# Allegro board ultrasound_dlp_p0_20171128.brd
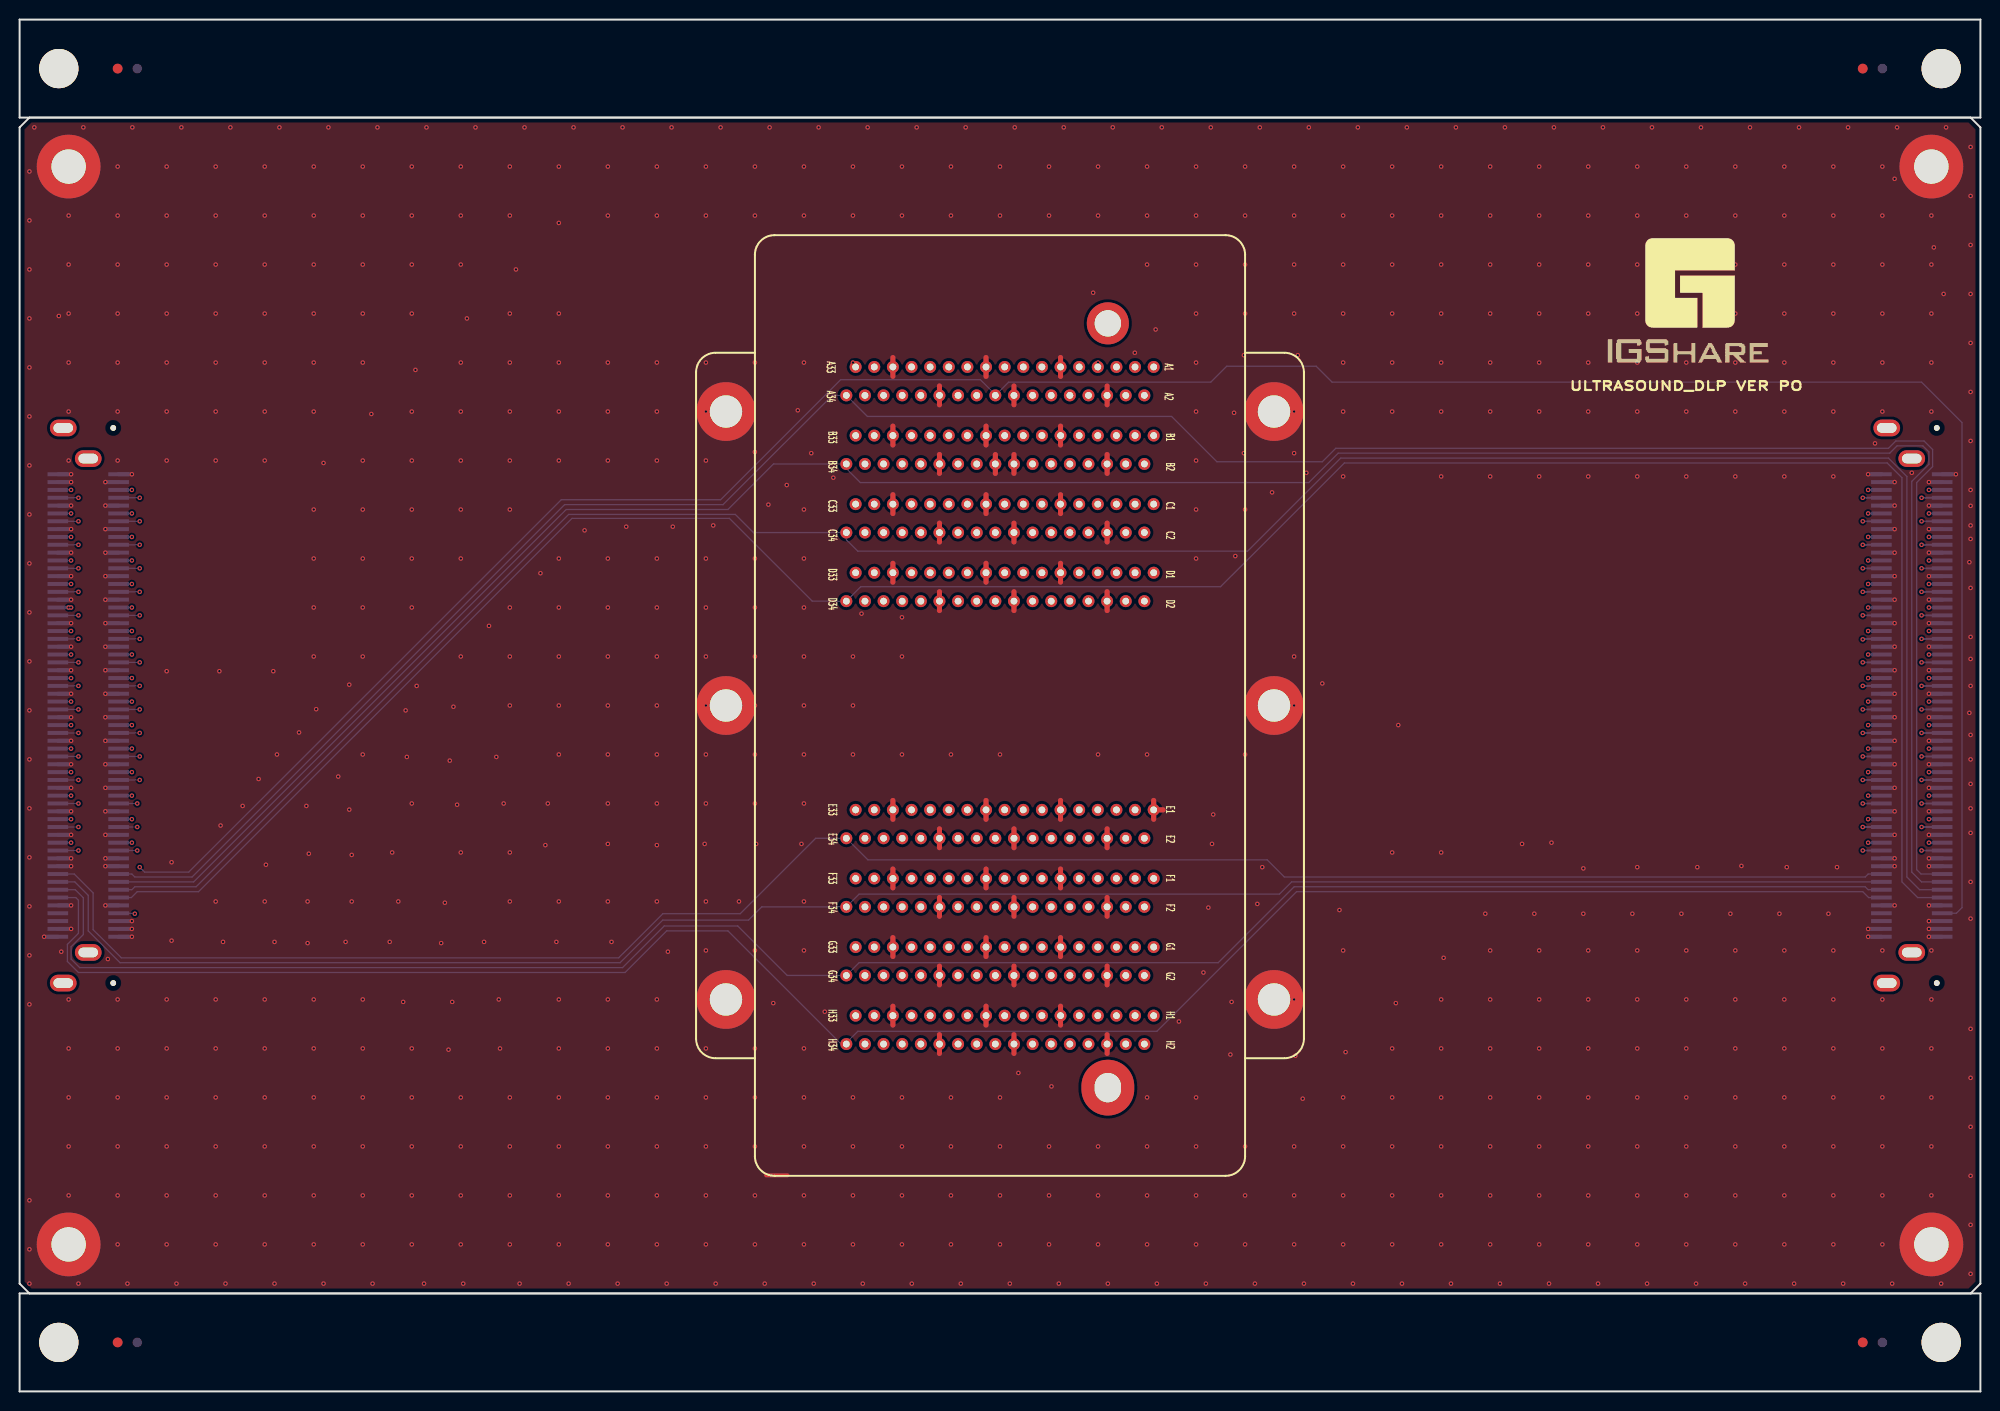
[diagram p0: board, top side]
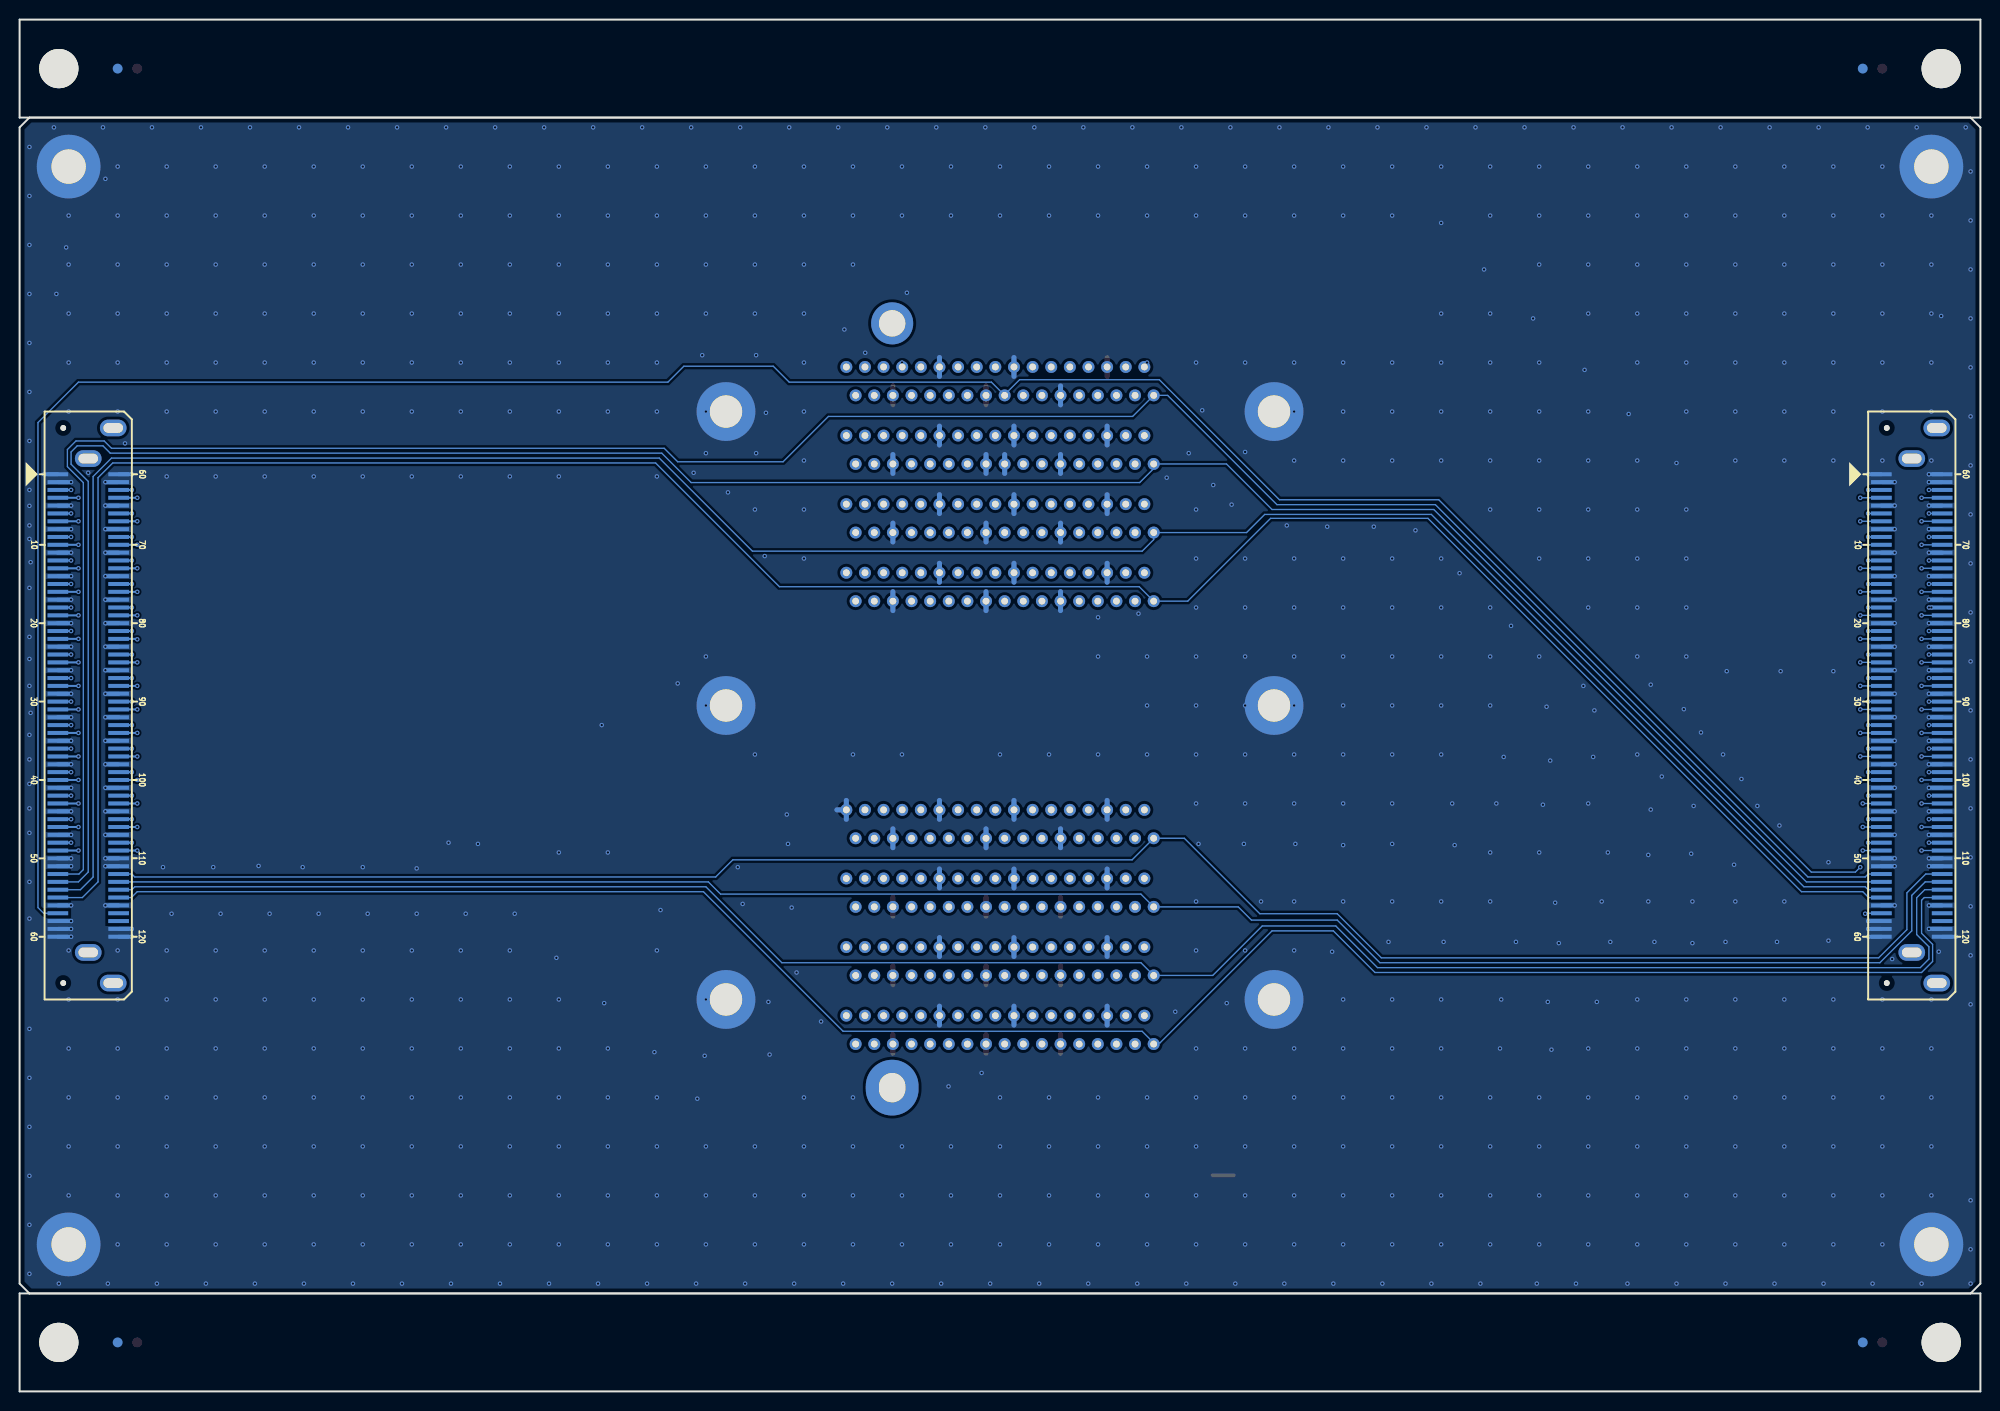
[diagram p1: board, bottom side, seen from below]

Outline 200 x 140 mm; copper layers: TOP, SIG1, GND1, SIG2, GND2, SIG3, GND3, SIG4, GND4, BOTTOM. Coordinates in mm from the lower left corner of the outline.
Outline path: 199,10 1,10 0,11 0,129 1,130 199,130 200,129 200,11 199,10 ; 199,10 0,10 0,0 200,0 200,10 199,10 ; 0,140 0,130 200,130 200,140 0,140

## Placement (name value [footprint] x y rotation side)
H1  -  [PCB_HOLE]  5 125 0 top
H2  -  [PCB_HOLE]  195 125 0 top
H3  -  [PCB_HOLE]  5 15 0 top
H4  -  [PCB_HOLE]  195 15 0 top
J1  FX18-120P-0.8SV  [FX18-120P_0_8SV-HRS]  7 70 270 bottom
J2  FX18-120P-0.8SV  [FX18-120P_0_8SV-HRS]  193 70 270 bottom
J3  ITT__127050-0391  [ITT-127050-0391]  100 70 270 top
NOREF  -  [unnamed]  10 5 0 top
NOREF#2  -  [#2]  0 0 0 top
NOREF#3  -  [unnamed#2]  4 135 0 top
NOREF#4  -  [unnamed#2]  196 5 180 top
NOREF#5  -  [#2]  0 0 90 top
NOREF#6  -  [unnamed]  10 135 0 top
NOREF#7  -  [#2]  1 10 90 top
NOREF#8  -  [#2]  0 130 90 top
NOREF#9  -  [unnamed#2]  4 5 0 top
NOREF#10  -  [#2]  155.75 -17.25 0 top
NOREF#11  -  [unnamed]  188 135 180 top
NOREF#12  -  [unnamed#2]  196 135 180 top
NOREF#13  -  [#2]  162 105 0 top
NOREF#14  -  [#2]  207 35.75 0 top
NOREF#15  -  [unnamed]  188 5 180 top
NOREF#16  -  [unnamed]  12 135 180 bottom
NOREF#17  -  [unnamed]  190 135 0 bottom
NOREF#18  -  [unnamed]  12 5 180 bottom
NOREF#19  -  [unnamed]  190 5 0 bottom

## Library data of the parts
H1-H4 = _PCB_HOLE
J1 J2 = _FX18-120P_0_8SV-HRS
J3 = _ITT-127050-0391

## Footprints (pads in the part's own frame, mm; a bottom-side part is the same pattern mirrored in y, then rotated)
FX18-120P_0_8SV-HRS
  round 0.584 hole 0.61 unplated: (-28.325,-2.55) (28.325,-2.55)
  rect 0.406x2.108 smd: 1(-23.6,-3.1) 2(-22.8,-3.1) 3(-22,-3.1) 4(-21.2,-3.1) 5(-20.4,-3.1) 6(-19.6,-3.1) 7(-18.8,-3.1) 8(-18,-3.1) 9(-17.2,-3.1) 10(-16.4,-3.1) 11(-15.6,-3.1) 12(-14.8,-3.1) 13(-14,-3.1) 14(-13.2,-3.1) 15(-12.4,-3.1) 16(-11.6,-3.1) 17(-10.8,-3.1) 18(-10,-3.1) 19(-9.2,-3.1) 20(-8.4,-3.1) 21(-7.6,-3.1) 22(-6.8,-3.1) 23(-6,-3.1) 24(-5.2,-3.1) 25(-4.4,-3.1) 26(-3.6,-3.1) 27(-2.8,-3.1) 28(-2,-3.1) 29(-1.2,-3.1) 30(-0.4,-3.1) 31(0.4,-3.1) 32(1.2,-3.1) 33(2,-3.1) 34(2.8,-3.1) 35(3.6,-3.1) 36(4.4,-3.1) 37(5.2,-3.1) 38(6,-3.1) 39(6.8,-3.1) 40(7.6,-3.1) 41(8.4,-3.1) 42(9.2,-3.1) 43(10,-3.1) 44(10.8,-3.1) 45(11.6,-3.1) 46(12.4,-3.1) 47(13.2,-3.1) 48(14,-3.1) 49(14.8,-3.1) 50(15.6,-3.1) 51(16.4,-3.1) 52(17.2,-3.1) 53(18,-3.1) 54(18.8,-3.1) 55(19.6,-3.1) 56(20.4,-3.1) 57(21.2,-3.1) 58(22,-3.1) 59(22.8,-3.1) 60(23.6,-3.1) 61(-23.6,3.1) 62(-22.8,3.1) 63(-22,3.1) 64(-21.2,3.1) 65(-20.4,3.1) 66(-19.6,3.1) 67(-18.8,3.1) 68(-18,3.1) 69(-17.2,3.1) 70(-16.4,3.1) 71(-15.6,3.1) 72(-14.8,3.1) 73(-14,3.1) 74(-13.2,3.1) 75(-12.4,3.1) 76(-11.6,3.1) 77(-10.8,3.1) 78(-10,3.1) 79(-9.2,3.1) 80(-8.4,3.1) 81(-7.6,3.1) 82(-6.8,3.1) 83(-6,3.1) 84(-5.2,3.1) 85(-4.4,3.1) 86(-3.6,3.1) 87(-2.8,3.1) 88(-2,3.1) 89(-1.2,3.1) 90(-0.4,3.1) 91(0.4,3.1) 92(1.2,3.1) 93(2,3.1) 94(2.8,3.1) 95(3.6,3.1) 96(4.4,3.1) 97(5.2,3.1) 98(6,3.1) 99(6.8,3.1) 100(7.6,3.1) 101(8.4,3.1) 102(9.2,3.1) 103(10,3.1) 104(10.8,3.1) 105(11.6,3.1) 106(12.4,3.1) 107(13.2,3.1) 108(14,3.1) 109(14.8,3.1) 110(15.6,3.1) 111(16.4,3.1) 112(17.2,3.1) 113(18,3.1) 114(18.8,3.1) 115(19.6,3.1) 116(20.4,3.1) 117(21.2,3.1) 118(22,3.1) 119(22.8,3.1) 120(23.6,3.1)
  oval 1.702x2.718 hole 0.991x2.007: 121(-28.325,2.55) 122(-25.2,0) 123(25.2,0) 124(28.325,2.55)
ITT-127050-0391
  round 1.219 hole 0.7: A1(-34.55,15.675) A2(-31.65,14.725) A3(-34.55,13.775) A4(-31.65,12.825) A5(-34.55,11.875) A6(-31.65,10.925) A7(-34.55,9.975) A8(-31.65,9.025) A9(-34.55,8.075) A10(-31.65,7.125) A11(-34.55,6.175) A12(-31.65,5.225) A13(-34.55,4.275) A14(-31.65,3.325) A15(-34.55,2.375) A16(-31.65,1.425) A17(-34.55,0.475) A18(-31.65,-0.475) A19(-34.55,-1.425) A20(-31.65,-2.375) A21(-34.55,-3.325) A22(-31.65,-4.275) A23(-34.55,-5.225) A24(-31.65,-6.175) A25(-34.55,-7.125) A26(-31.65,-8.075) A27(-34.55,-9.025) A28(-31.65,-9.975) A29(-34.55,-10.925) A30(-31.65,-11.875) A31(-34.55,-12.825) A32(-31.65,-13.775) A33(-34.55,-14.725) A34(-31.65,-15.675) B1(-27.55,15.675) B2(-24.65,14.725) B3(-27.55,13.775) B4(-24.65,12.825) B5(-27.55,11.875) B6(-24.65,10.925) B7(-27.55,9.975) B8(-24.65,9.025) B9(-27.55,8.075) B10(-24.65,7.125) B11(-27.55,6.175) B12(-24.65,5.225) B13(-27.55,4.275) B14(-24.65,3.325) B15(-27.55,2.375) B16(-24.65,1.425) B17(-27.55,0.475) B18(-24.65,-0.475) B19(-27.55,-1.425) B20(-24.65,-2.375) B21(-27.55,-3.325) B22(-24.65,-4.275) B23(-27.55,-5.225) B24(-24.65,-6.175) B25(-27.55,-7.125) B26(-24.65,-8.075) B27(-27.55,-9.025) B28(-24.65,-9.975) B29(-27.55,-10.925) B30(-24.65,-11.875) B31(-27.55,-12.825) B32(-24.65,-13.775) B33(-27.55,-14.725) B34(-24.65,-15.675) C1(-20.55,15.675) C2(-17.65,14.725) C3(-20.55,13.775) C4(-17.65,12.825) C5(-20.55,11.875) C6(-17.65,10.925) C7(-20.55,9.975) C8(-17.65,9.025) C9(-20.55,8.075) C10(-17.65,7.125) C11(-20.55,6.175) C12(-17.65,5.225) C13(-20.55,4.275) C14(-17.65,3.325) C15(-20.55,2.375) C16(-17.65,1.425) C17(-20.55,0.475) C18(-17.65,-0.475) C19(-20.55,-1.425) C20(-17.65,-2.375) C21(-20.55,-3.325) C22(-17.65,-4.275) C23(-20.55,-5.225) C24(-17.65,-6.175) C25(-20.55,-7.125) C26(-17.65,-8.075) C27(-20.55,-9.025) C28(-17.65,-9.975) C29(-20.55,-10.925) C30(-17.65,-11.875) C31(-20.55,-12.825) C32(-17.65,-13.775) C33(-20.55,-14.725) C34(-17.65,-15.675) D1(-13.55,15.675) D2(-10.65,14.725) D3(-13.55,13.775) D4(-10.65,12.825) D5(-13.55,11.875) D6(-10.65,10.925) D7(-13.55,9.975) D8(-10.65,9.025) D9(-13.55,8.075) D10(-10.65,7.125) D11(-13.55,6.175) D12(-10.65,5.225) D13(-13.55,4.275) D14(-10.65,3.325) D15(-13.55,2.375) D16(-10.65,1.425) D17(-13.55,0.475) D18(-10.65,-0.475) D19(-13.55,-1.425) D20(-10.65,-2.375) D21(-13.55,-3.325) D22(-10.65,-4.275) D23(-13.55,-5.225) D24(-10.65,-6.175) D25(-13.55,-7.125) D26(-10.65,-8.075) D27(-13.55,-9.025) D28(-10.65,-9.975) D29(-13.55,-10.925) D30(-10.65,-11.875) D31(-13.55,-12.825) D32(-10.65,-13.775) D33(-13.55,-14.725) D34(-10.65,-15.675) E1(10.65,15.675) E2(13.55,14.725) E3(10.65,13.775) E4(13.55,12.825) E5(10.65,11.875) E6(13.55,10.925) E7(10.65,9.975) E8(13.55,9.025) E9(10.65,8.075) E10(13.55,7.125) E11(10.65,6.175) E12(13.55,5.225) E13(10.65,4.275) E14(13.55,3.325) E15(10.65,2.375) E16(13.55,1.425) E17(10.65,0.475) E18(13.55,-0.475) E19(10.65,-1.425) E20(13.55,-2.375) E21(10.65,-3.325) E22(13.55,-4.275) E23(10.65,-5.225) E24(13.55,-6.175) E25(10.65,-7.125) E26(13.55,-8.075) E27(10.65,-9.025) E28(13.55,-9.975) E29(10.65,-10.925) E30(13.55,-11.875) E31(10.65,-12.825) E32(13.55,-13.775) E33(10.65,-14.725) E34(13.55,-15.675) F1(17.65,15.675) F2(20.55,14.725) F3(17.65,13.775) F4(20.55,12.825) F5(17.65,11.875) F6(20.55,10.925) F7(17.65,9.975) F8(20.55,9.025) F9(17.65,8.075) F10(20.55,7.125) F11(17.65,6.175) F12(20.55,5.225) F13(17.65,4.275) F14(20.55,3.325) F15(17.65,2.375) F16(20.55,1.425) F17(17.65,0.475) F18(20.55,-0.475) F19(17.65,-1.425) F20(20.55,-2.375) F21(17.65,-3.325) F22(20.55,-4.275) F23(17.65,-5.225) F24(20.55,-6.175) F25(17.65,-7.125) F26(20.55,-8.075) F27(17.65,-9.025) F28(20.55,-9.975) F29(17.65,-10.925) F30(20.55,-11.875) F31(17.65,-12.825) F32(20.55,-13.775) F33(17.65,-14.725) F34(20.55,-15.675) G1(24.65,15.675) G2(27.55,14.725) G3(24.65,13.775) G4(27.55,12.825) G5(24.65,11.875) G6(27.55,10.925) G7(24.65,9.975) G8(27.55,9.025) G9(24.65,8.075) G10(27.55,7.125) G11(24.65,6.175) G12(27.55,5.225) G13(24.65,4.275) G14(27.55,3.325) G15(24.65,2.375) G16(27.55,1.425) G17(24.65,0.475) G18(27.55,-0.475) G19(24.65,-1.425) G20(27.55,-2.375) G21(24.65,-3.325) G22(27.55,-4.275) G23(24.65,-5.225) G24(27.55,-6.175) G25(24.65,-7.125) G26(27.55,-8.075) G27(24.65,-9.025) G28(27.55,-9.975) G29(24.65,-10.925) G30(27.55,-11.875) G31(24.65,-12.825) G32(27.55,-13.775) G33(24.65,-14.725) G34(27.55,-15.675) H1(31.65,15.675) H2(34.55,14.725) H3(31.65,13.775) H4(34.55,12.825) H5(31.65,11.875) H6(34.55,10.925) H7(31.65,9.975) H8(34.55,9.025) H9(31.65,8.075) H10(34.55,7.125) H11(31.65,6.175) H12(34.55,5.225) H13(31.65,4.275) H14(34.55,3.325) H15(31.65,2.375) H16(34.55,1.425) H17(31.65,0.475) H18(34.55,-0.475) H19(31.65,-1.425) H20(34.55,-2.375) H21(31.65,-3.325) H22(34.55,-4.275) H23(31.65,-5.225) H24(34.55,-6.175) H25(31.65,-7.125) H26(34.55,-8.075) H27(31.65,-9.025) H28(34.55,-9.975) H29(31.65,-10.925) H30(34.55,-11.875) H31(31.65,-12.825) H32(34.55,-13.775) H33(31.65,-14.725) H34(34.55,-15.675)
  round 6 hole 3.3: AD1(-30,27.95) AD2(0,27.95) AD3(30,27.95) AD4(30,-27.95) AD5(0,-27.95) AD6(-30,-27.95)
  round 4.293 hole 2.7: AD7(-39,11)
  oval 5.69x5.385 hole 2.997x2.692: AD8(39,11)
PCB_HOLE
  round 6.502 hole 3.505: 1(0,0)
unnamed
  round 1 smd: (0,0)
unnamed#2
  round 4 hole 4 unplated: (0,0)

## Nets
GND: H1.1 H2.1 H3.1 H4.1 J1.1 J1.2 J1.5 J1.8 J1.11 J1.14 J1.17 J1.20 J1.23 J1.26 J1.29 J1.32 J1.35 J1.38 J1.41 J1.44 J1.47 J1.50 J1.51 J1.56 J1.58 J1.59 J1.60 J1.61 J1.62 J1.65 J1.68 J1.71 J1.74 J1.77 J1.80 J1.83 J1.86 J1.89 J1.92 J1.95 J1.98 J1.101 J1.104 J1.107 J1.110 J1.111 J1.116 J1.119 J1.120 J2.1 J2.2 J2.5 J2.8 J2.11 J2.14 J2.17 J2.20 J2.23 J2.26 J2.29 J2.32 J2.35 J2.38 J2.41 J2.44 J2.47 J2.50 J2.51 J2.56 J2.58 J2.59 J2.60 J2.61 J2.62 J2.65 J2.68 J2.71 J2.74 J2.77 J2.80 J2.83 J2.86 J2.89 J2.92 J2.95 J2.98 J2.101 J2.104 J2.107 J2.110 J2.111 J2.116 J2.119 J2.120 J3.A6 J3.A11 J3.A16 J3.A19 J3.A24 J3.A29 J3.AD1 J3.AD2 J3.AD3 J3.AD4 J3.AD5 J3.AD6 J3.B6 J3.B11 J3.B16 J3.B18 J3.B19 J3.B24 J3.B29 J3.C6 J3.C11 J3.C16 J3.C19 J3.C24 J3.C29 J3.D6 J3.D11 J3.D16 J3.D19 J3.D24 J3.D29 J3.E1 J3.E6 J3.E11 J3.E16 J3.E19 J3.E24 J3.E29 J3.F6 J3.F11 J3.F16 J3.F19 J3.F24 J3.F29 J3.G6 J3.G11 J3.G16 J3.G19 J3.G24 J3.G29 J3.H6 J3.H11 J3.H16 J3.H19 J3.H24 J3.H29
PRB_EL_D0: J1.3 J2.3 J3.D12
PRB_EL_D1: J1.4 J2.4 J3.D13
PRB_EL_D2: J1.6 J2.6 J3.D14
PRB_EL_D3: J1.7 J2.7 J3.D15
PRB_EL_D4: J1.9 J2.9 J3.C12
PRB_EL_D5: J1.10 J2.10 J3.C13
PRB_EL_D6: J1.12 J2.12 J3.C14
PRB_EL_D7: J1.13 J2.13 J3.C15
PRB_EL_D8: J1.15 J2.15 J3.B12
PRB_EL_D9: J1.16 J2.16 J3.B13
PRB_EL_D10: J1.18 J2.18 J3.B14
PRB_EL_D11: J1.19 J2.19 J3.B15
PRB_EL_D12: J1.21 J2.21 J3.A12
PRB_EL_D13: J1.22 J2.22 J3.A13
PRB_EL_D14: J1.24 J2.24 J3.A14
PRB_EL_D15: J1.25 J2.25 J3.A15
PRB_EL_D16: J1.27 J2.27 J3.E12
PRB_EL_D17: J1.28 J2.28 J3.E13
PRB_EL_D18: J1.30 J2.30 J3.E14
PRB_EL_D19: J1.31 J2.31 J3.E15
PRB_EL_D20: J1.33 J2.33 J3.F12
PRB_EL_D21: J1.34 J2.34 J3.F13
PRB_EL_D22: J1.36 J2.36 J3.F14
PRB_EL_D23: J1.37 J2.37 J3.F15
PRB_EL_D24: J1.39 J2.39 J3.G12
PRB_EL_D25: J1.40 J2.40 J3.G13
PRB_EL_D26: J1.42 J2.42 J3.G14
PRB_EL_D27: J1.43 J2.43 J3.G15
PRB_EL_D28: J1.45 J2.45 J3.H12
PRB_EL_D29: J1.46 J2.46 J3.H13
PRB_EL_D30: J1.48 J2.48 J3.H14
PRB_EL_D31: J1.49 J2.49 J3.H15
PRB_EL_D32: J1.63 J2.63 J3.D20
PRB_EL_D33: J1.64 J2.64 J3.D21
PRB_EL_D34: J1.66 J2.66 J3.D22
PRB_EL_D35: J1.67 J2.67 J3.D23
PRB_EL_D36: J1.69 J2.69 J3.C20
PRB_EL_D37: J1.70 J2.70 J3.C21
PRB_EL_D38: J1.72 J2.72 J3.C22
PRB_EL_D39: J1.73 J2.73 J3.C23
PRB_EL_D40: J1.75 J2.75 J3.B20
PRB_EL_D41: J1.76 J2.76 J3.B21
PRB_EL_D42: J1.78 J2.78 J3.B22
PRB_EL_D43: J1.79 J2.79 J3.B23
PRB_EL_D44: J1.81 J2.81 J3.A20
PRB_EL_D45: J1.82 J2.82 J3.A21
PRB_EL_D46: J1.84 J2.84 J3.A22
PRB_EL_D47: J1.85 J2.85 J3.A23
PRB_EL_D48: J1.87 J2.87 J3.E20
PRB_EL_D49: J1.88 J2.88 J3.E21
PRB_EL_D50: J1.90 J2.90 J3.E22
PRB_EL_D51: J1.91 J2.91 J3.E23
PRB_EL_D52: J1.93 J2.93 J3.F20
PRB_EL_D53: J1.94 J2.94 J3.F21
PRB_EL_D54: J1.96 J2.96 J3.F22
PRB_EL_D55: J1.97 J2.97 J3.F23
PRB_EL_D56: J1.99 J2.99 J3.G20
PRB_EL_D57: J1.100 J2.100 J3.G21
PRB_EL_D58: J1.102 J2.102 J3.G22
PRB_EL_D59: J1.103 J2.103 J3.G23
PRB_EL_D60: J1.105 J2.105 J3.H20
PRB_EL_D61: J1.106 J2.106 J3.H21
PRB_EL_D62: J1.108 J2.108 J3.H22
PRB_EL_D63: J1.109 J2.109 J3.H23
PRBA_PID_0: J1.52 J2.52 J3.A34
PRBA_PID_1: J1.53 J2.53 J3.B34
PRBA_PID_2: J1.54 J2.54 J3.C34
PRBA_PID_3: J1.55 J2.55 J3.D34
PRBA_PID_4: J1.112 J2.112 J3.E34
PRBA_PID_5: J1.113 J2.113 J3.F34
PRBA_PID_6: J1.114 J2.114 J3.G34
PRBA_PID_7: J1.115 J2.115 J3.H34
TXCL: J1.57 J2.57 J3.A18

Pads without a net: J1 117 118 121 122 123 124; J2 117 118 121 122 123 124; J3 A1 A2 A3 A4 A5 A7 A8 A9 A10 A17 A25 A26 A27 A28 A30 A31 A32 A33 AD7 AD8 B1 B2 B3 B4 B5 B7 B8 B9 B10 B17 B25 B26 B27 B28 B30 B31 B32 B33 C1 C2 C3 C4 C5 C7 C8 C9 C10 C17 C18 C25 C26 C27 C28 C30 C31 C32 C33 D1 D2 D3 D4 D5 D7 D8 D9 D10 D17 D18 D25 D26 D27 D28 D30 D31 D32 D33 E2 E3 E4 E5 E7 E8 E9 E10 E17 E18 E25 E26 E27 E28 E30 E31 E32 E33 F1 F2 F3 F4 F5 F7 F8 F9 F10 F17 F18 F25 F26 F27 F28 F30 F31 F32 F33 G1 G2 G3 G4 G5 G7 G8 G9 G10 G17 G18 G25 G26 G27 G28 G30 G31 G32 G33 H1 H2 H3 H4 H5 H7 H8 H9 H10 H17 H18 H25 H26 H27 H28 H30 H31 H32 H33

## Via types
v1: diameter 0.457, hole 0.25, TOP to BOTTOM, 988 vias

## Routing (per net, layer and track width the routed paths; a pad name or vN(x,y) marks a point on that pad's centre or on a via; arc(x,y) is an arc through that point)
GND: length 682.8
  TOP w0.4: 78.33,22.05 76.15,22.05
  TOP w0.515: 89.08,91.51 J3.C29 89.08,89.59 ; 89.08,60.31 J3.E29 89.08,58.39 ; 110.92,93.69 J3.B6 110.92,95.61 ; J3.E1 115.68,60.31 ; J3.E1 115.68,58.39 ; J3.E1 116.64,59.35 ; 106.17,98.51 J3.B11 106.17,96.59 ; 98.58,51.39 J3.F19 98.58,53.31 ; 101.42,57.41 J3.E16 101.42,55.49 ; 106.17,46.31 J3.G11 106.17,44.39 ; 110.92,48.49 J3.F6 110.92,50.41 ; 98.58,89.59 J3.C19 98.58,91.51 ; 89.08,51.39 J3.F29 89.08,53.31 ; 93.83,81.61 J3.D24 93.83,79.69 ; 101.42,43.41 J3.G16 101.42,41.49 ; 110.92,81.61 J3.D6 110.92,79.69 ; 98.58,82.59 J3.D19 98.58,84.51 ; 110.92,102.61 J3.A6 110.92,100.69 ; 89.08,103.59 J3.A29 89.08,105.51 ; 106.17,91.51 J3.C11 106.17,89.59 ; 110.92,41.49 J3.G6 110.92,43.41 ; 89.08,98.51 J3.B29 89.08,96.59 ; 101.42,100.69 J3.A16 101.42,102.61 ; 98.58,105.51 J3.A19 98.58,103.59 ; 93.83,48.49 J3.F24 93.83,50.41 ; 101.42,50.41 J3.F16 101.42,48.49 ; 110.92,55.49 J3.E6 110.92,57.41 ; 93.83,41.49 J3.G24 93.83,43.41 ; 93.83,86.69 J3.C24 93.83,88.61 ; 106.17,53.31 J3.F11 106.17,51.39 ; 98.58,96.59 J3.B19 98.58,98.51 ; 110.92,86.69 J3.C6 110.92,88.61 ; 98.58,44.39 J3.G19 98.58,46.31 ; 93.83,55.49 J3.E24 93.83,57.41 ; 89.08,44.39 J3.G29 89.08,46.31 ; 101.42,86.69 J3.C16 101.42,88.61 ; 98.58,60.31 J3.E19 98.58,58.39 ; 101.42,79.69 J3.D16 101.42,81.61 ; 98.58,37.39 J3.H19 98.58,39.31 ; 89.08,39.31 J3.H29 89.08,37.39 ; 106.17,82.59 J3.D11 106.17,84.51 ; 93.83,36.41 J3.H24 93.83,34.49 ; 106.17,58.39 J3.E11 106.17,60.31 ; 101.42,95.61 J3.B16 101.42,93.69 ; 110.92,36.41 J3.H6 110.92,34.49 ; 93.83,102.61 J3.A24 93.83,100.69 ; 93.83,93.69 J3.B24 93.83,95.61 ; 89.08,84.51 J3.D29 89.08,82.59 ; 99.53,95.61 J3.B18 99.53,93.69 ; 106.17,39.31 J3.H11 106.17,37.39 ; 106.17,105.51 J3.A11 106.17,103.59 ; 101.42,34.49 J3.H16 101.42,36.41
  GND1 w0.53: 93.83,93.69 J3.B24 93.83,95.61 ; 101.42,48.49 J3.F16 101.42,50.41 ; 93.83,81.61 J3.D24 93.83,79.69 ; 110.92,36.41 J3.H6 110.92,34.49 ; 110.92,88.61 J3.C6 110.92,86.69 ; 93.83,100.69 J3.A24 93.83,102.61 ; 98.58,98.51 J3.B19 98.58,96.59 ; 106.17,96.59 J3.B11 106.17,98.51 ; 98.58,37.39 J3.H19 98.58,39.31 ; 93.83,50.41 J3.F24 93.83,48.49 ; 106.17,82.59 J3.D11 106.17,84.51 ; 89.08,37.39 J3.H29 89.08,39.31 ; 110.92,57.41 J3.E6 110.92,55.49 ; 98.58,51.39 J3.F19 98.58,53.31 ; 93.83,88.61 J3.C24 93.83,86.69 ; 110.92,48.49 J3.F6 110.92,50.41 ; 101.42,43.41 J3.G16 101.42,41.49 ; 98.58,91.51 J3.C19 98.58,89.59 ; 110.92,100.69 J3.A6 110.92,102.61 ; 101.42,93.69 J3.B16 101.42,95.61 ; 101.42,86.69 J3.C16 101.42,88.61 ; 101.42,100.69 J3.A16 101.42,102.61 ; 89.08,84.51 J3.D29 89.08,82.59 ; 98.58,105.51 J3.A19 98.58,103.59 ; 110.92,79.69 J3.D6 110.92,81.61 ; 89.08,44.39 J3.G29 89.08,46.31 ; 101.42,36.41 J3.H16 101.42,34.49 ; 93.83,43.41 J3.G24 93.83,41.49 ; 98.58,58.39 J3.E19 98.58,60.31 ; 110.92,95.61 J3.B6 110.92,93.69 ; 106.17,105.51 J3.A11 106.17,103.59 ; 115.68,58.39 J3.E1 ; J3.E1 115.68,60.31 ; J3.E1 116.64,59.35 ; 89.08,105.51 J3.A29 89.08,103.59 ; 106.17,37.39 J3.H11 106.17,39.31 ; 101.42,57.41 J3.E16 101.42,55.49 ; 106.17,46.31 J3.G11 106.17,44.39 ; 98.58,84.51 J3.D19 98.58,82.59 ; 110.92,41.49 J3.G6 110.92,43.41 ; 98.58,46.31 J3.G19 98.58,44.39 ; 89.08,91.51 J3.C29 89.08,89.59 ; 99.53,93.69 J3.B18 99.53,95.61 ; 89.08,53.31 J3.F29 89.08,51.39 ; 89.08,96.59 J3.B29 89.08,98.51 ; 106.17,60.31 J3.E11 106.17,58.39 ; 101.42,81.61 J3.D16 101.42,79.69 ; 106.17,53.31 J3.F11 106.17,51.39 ; 106.17,89.59 J3.C11 106.17,91.51 ; 89.08,60.31 J3.E29 89.08,58.39 ; 93.83,55.49 J3.E24 93.83,57.41 ; 93.83,36.41 J3.H24 93.83,34.49
  GND2 w0.53: 101.42,86.69 J3.C16 101.42,88.61 ; 106.17,105.51 J3.A11 106.17,103.59 ; 110.92,57.41 J3.E6 110.92,55.49 ; 106.17,96.59 J3.B11 106.17,98.51 ; 99.53,93.69 J3.B18 99.53,95.61 ; 106.17,39.31 J3.H11 106.17,37.39 ; 89.08,105.51 J3.A29 89.08,103.59 ; 89.08,37.39 J3.H29 89.08,39.31 ; 101.42,41.49 J3.G16 101.42,43.41 ; 98.58,53.31 J3.F19 98.58,51.39 ; 98.58,46.31 J3.G19 98.58,44.39 ; 106.17,46.31 J3.G11 106.17,44.39 ; 110.92,36.41 J3.H6 110.92,34.49 ; 93.83,57.41 J3.E24 93.83,55.49 ; 98.58,96.59 J3.B19 98.58,98.51 ; 89.08,89.59 J3.C29 89.08,91.51 ; 89.08,98.51 J3.B29 89.08,96.59 ; 101.42,48.49 J3.F16 101.42,50.41 ; 98.58,58.39 J3.E19 98.58,60.31 ; 93.83,79.69 J3.D24 93.83,81.61 ; 89.08,53.31 J3.F29 89.08,51.39 ; 89.08,82.59 J3.D29 89.08,84.51 ; 115.68,58.39 J3.E1 ; J3.E1 115.68,60.31 ; J3.E1 116.64,59.35 ; 93.83,41.49 J3.G24 93.83,43.41 ; 110.92,48.49 J3.F6 110.92,50.41 ; 110.92,43.41 J3.G6 110.92,41.49 ; 98.58,91.51 J3.C19 98.58,89.59 ; 93.83,100.69 J3.A24 93.83,102.61 ; 101.42,57.41 J3.E16 101.42,55.49 ; 106.17,89.59 J3.C11 106.17,91.51 ; 110.92,79.69 J3.D6 110.92,81.61 ; 110.92,93.69 J3.B6 110.92,95.61 ; 101.42,102.61 J3.A16 101.42,100.69 ; 89.08,58.39 J3.E29 89.08,60.31 ; 98.58,103.59 J3.A19 98.58,105.51 ; 93.83,95.61 J3.B24 93.83,93.69 ; 106.17,58.39 J3.E11 106.17,60.31 ; 106.17,84.51 J3.D11 106.17,82.59 ; 89.08,46.31 J3.G29 89.08,44.39 ; 110.92,88.61 J3.C6 110.92,86.69 ; 106.17,51.39 J3.F11 106.17,53.31 ; 93.83,48.49 J3.F24 93.83,50.41 ; 98.58,39.31 J3.H19 98.58,37.39 ; 93.83,88.61 J3.C24 93.83,86.69 ; 101.42,79.69 J3.D16 101.42,81.61 ; 101.42,95.61 J3.B16 101.42,93.69 ; 101.42,34.49 J3.H16 101.42,36.41 ; 93.83,36.41 J3.H24 93.83,34.49 ; 98.58,84.51 J3.D19 98.58,82.59 ; 110.92,102.61 J3.A6 110.92,100.69
  GND3 w0.515: 98.58,39.31 J3.H19 98.58,37.39 ; 89.08,46.31 J3.G29 89.08,44.39 ; 99.53,93.69 J3.B18 99.53,95.61 ; 110.92,93.69 J3.B6 110.92,95.61 ; 101.42,102.61 J3.A16 101.42,100.69 ; 93.83,100.69 J3.A24 93.83,102.61 ; 106.17,84.51 J3.D11 106.17,82.59 ; 93.83,88.61 J3.C24 93.83,86.69 ; 106.17,98.51 J3.B11 106.17,96.59 ; 101.42,48.49 J3.F16 101.42,50.41 ; 89.08,60.31 J3.E29 89.08,58.39 ; 98.58,103.59 J3.A19 98.58,105.51 ; 101.42,57.41 J3.E16 101.42,55.49 ; 106.17,60.31 J3.E11 106.17,58.39 ; 98.58,53.31 J3.F19 98.58,51.39 ; 93.83,81.61 J3.D24 93.83,79.69 ; 98.58,91.51 J3.C19 98.58,89.59 ; 110.92,36.41 J3.H6 110.92,34.49 ; 98.58,98.51 J3.B19 98.58,96.59 ; 93.83,95.61 J3.B24 93.83,93.69 ; 101.42,79.69 J3.D16 101.42,81.61 ; 106.17,103.59 J3.A11 106.17,105.51 ; 89.08,96.59 J3.B29 89.08,98.51 ; 89.08,39.31 J3.H29 89.08,37.39 ; 106.17,46.31 J3.G11 106.17,44.39 ; 89.08,89.59 J3.C29 89.08,91.51 ; 106.17,51.39 J3.F11 106.17,53.31 ; 106.17,39.31 J3.H11 106.17,37.39 ; 110.92,79.69 J3.D6 110.92,81.61 ; 101.42,41.49 J3.G16 101.42,43.41 ; 89.08,51.39 J3.F29 89.08,53.31 ; 98.58,58.39 J3.E19 98.58,60.31 ; 106.17,89.59 J3.C11 106.17,91.51 ; 110.92,102.61 J3.A6 110.92,100.69 ; 101.42,93.69 J3.B16 101.42,95.61 ; 115.68,58.39 J3.E1 ; J3.E1 115.68,60.31 ; J3.E1 116.64,59.35 ; 110.92,48.49 J3.F6 110.92,50.41 ; 93.83,36.41 J3.H24 93.83,34.49 ; 93.83,57.41 J3.E24 93.83,55.49 ; 93.83,43.41 J3.G24 93.83,41.49 ; 101.42,36.41 J3.H16 101.42,34.49 ; 110.92,43.41 J3.G6 110.92,41.49 ; 98.58,44.39 J3.G19 98.58,46.31 ; 101.42,88.61 J3.C16 101.42,86.69 ; 98.58,82.59 J3.D19 98.58,84.51 ; 110.92,55.49 J3.E6 110.92,57.41 ; 89.08,103.59 J3.A29 89.08,105.51 ; 93.83,50.41 J3.F24 93.83,48.49 ; 89.08,84.51 J3.D29 89.08,82.59 ; 110.92,86.69 J3.C6 110.92,88.61
  GND4 w0.515: 106.17,39.31 J3.H11 106.17,37.39 ; 110.92,81.61 J3.D6 110.92,79.69 ; 101.42,55.49 J3.E16 101.42,57.41 ; 110.92,102.61 J3.A6 110.92,100.69 ; 101.42,79.69 J3.D16 101.42,81.61 ; 106.17,103.59 J3.A11 106.17,105.51 ; 89.08,98.51 J3.B29 89.08,96.59 ; 93.83,102.61 J3.A24 93.83,100.69 ; 93.83,95.61 J3.B24 93.83,93.69 ; 101.42,41.49 J3.G16 101.42,43.41 ; 110.92,88.61 J3.C6 110.92,86.69 ; 93.83,55.49 J3.E24 93.83,57.41 ; 98.58,105.51 J3.A19 98.58,103.59 ; 93.83,86.69 J3.C24 93.83,88.61 ; 101.42,50.41 J3.F16 101.42,48.49 ; 93.83,79.69 J3.D24 93.83,81.61 ; 89.08,89.59 J3.C29 89.08,91.51 ; 98.58,98.51 J3.B19 98.58,96.59 ; 101.42,100.69 J3.A16 101.42,102.61 ; 98.58,84.51 J3.D19 98.58,82.59 ; 101.42,34.49 J3.H16 101.42,36.41 ; 106.17,46.31 J3.G11 106.17,44.39 ; 106.17,84.51 J3.D11 106.17,82.59 ; 93.83,36.41 J3.H24 93.83,34.49 ; 110.92,41.49 J3.G6 110.92,43.41 ; 110.92,36.41 J3.H6 110.92,34.49 ; 110.92,55.49 J3.E6 110.92,57.41 ; 93.83,50.41 J3.F24 93.83,48.49 ; 89.08,39.31 J3.H29 89.08,37.39 ; 101.42,88.61 J3.C16 101.42,86.69 ; 98.58,60.31 J3.E19 98.58,58.39 ; 106.17,96.59 J3.B11 106.17,98.51 ; 99.53,95.61 J3.B18 99.53,93.69 ; 98.58,44.39 J3.G19 98.58,46.31 ; 106.17,91.51 J3.C11 106.17,89.59 ; 89.08,51.39 J3.F29 89.08,53.31 ; 89.08,46.31 J3.G29 89.08,44.39 ; 110.92,48.49 J3.F6 110.92,50.41 ; 89.08,82.59 J3.D29 89.08,84.51 ; 93.83,43.41 J3.G24 93.83,41.49 ; 89.08,60.31 J3.E29 89.08,58.39 ; J3.E1 116.64,59.35 ; J3.E1 115.68,58.39 ; J3.E1 115.68,60.31 ; 89.08,103.59 J3.A29 89.08,105.51 ; 98.58,53.31 J3.F19 98.58,51.39 ; 98.58,91.51 J3.C19 98.58,89.59 ; 101.42,95.61 J3.B16 101.42,93.69 ; 98.58,39.31 J3.H19 98.58,37.39 ; 106.17,60.31 J3.E11 106.17,58.39 ; 106.17,51.39 J3.F11 106.17,53.31 ; 110.92,95.61 J3.B6 110.92,93.69
  BOTTOM w0.4: J2.14 v1(194.75,83.2) ; J1.1 v1(11.45,93.6) ; J2.56 v1(194.75,49.6) ; J1.35 v1(8.75,66.4) ; J2.111 v1(191.25,53.6) ; J2.5 v1(194.75,90.4) ; J1.50 v1(8.75,54.4) ; J2.29 v1(194.75,71.2) ; J2.110 v1(191.25,54.4) ; J1.11 v1(8.75,85.6) ; J1.111 v1(5.25,53.6) ; J2.20 v1(194.75,78.4) ; J1.58 v1(11.45,48) ; J2.74 v1(191.25,83.2) ; J2.61 v1(188.55,93.6) ; J1.71 v1(5.25,85.6) ; J1.5 v1(8.75,90.4) ; J2.92 v1(191.25,68.8) ; J1.2 v1(8.75,92.8) ; J1.120 v1(2.5,46.4) ; J2.86 v1(191.25,73.6) ; J2.77 v1(191.25,80.8) ; J2.44 v1(194.75,59.2) ; J1.68 v1(5.25,88) ; J2.104 v1(191.25,59.2) ; J2.32 v1(194.75,68.8) ; J1.59 v1(11.45,47.2) ; J1.95 v1(5.25,66.4) ; J2.47 v1(194.75,56.8) ; J1.89 v1(5.25,71.2) ; J1.65 v1(5.25,90.4) ; J2.101 v1(191.25,61.6) ; J1.41 v1(8.75,61.6) ; J2.107 v1(191.25,56.8) ; J1.101 v1(5.25,61.6) ; J1.110 v1(5.25,54.4) ; J1.44 v1(8.75,59.2) ; J2.38 v1(194.75,64) ; J1.60 v1(11.45,46.4) ; J1.62 v1(5.25,92.8) ; J2.68 v1(191.25,88) ; J1.107 v1(5.25,56.8) ; J2.50 v1(194.75,54.4) ; J2.119 v1(188.55,47.2) ; J1.26 v1(8.75,73.6) ; J1.32 v1(8.75,68.8) ; J1.92 v1(5.25,68.8) ; J1.8 v1(8.75,88) ; J2.80 v1(191.25,78.4) ; J2.98 v1(191.25,64) ; J2.8 v1(194.75,88) ; J1.119 v1(5.25,47.2) ; J1.74 v1(5.25,83.2) ; J1.14 v1(8.75,83.2) ; J2.83 v1(191.25,76) ; J2.95 v1(191.25,66.4) ; J1.83 v1(5.25,76) ; J2.58 v1(194.75,48) ; J2.17 v1(194.75,80.8) ; J1.29 v1(8.75,71.2) ; J1.86 v1(5.25,73.6) ; J2.41 v1(194.75,61.6) ; J2.2 v1(194.75,92.8) ; J1.17 v1(8.75,80.8) ; J1.61 v1(5.25,93.6) ; J2.71 v1(191.25,85.6) ; J2.62 v1(191.25,92.8) ; J2.59 v1(194.75,47.2) ; J2.26 v1(194.75,73.6) ; J2.60 v1(194.75,46.4) ; J1.116 v1(5.25,49.6) ; J1.98 v1(5.25,64) ; J1.20 v1(8.75,78.4) ; J1.38 v1(8.75,64) ; J1.56 v1(8.75,49.6) ; J2.23 v1(194.75,76) ; J1.51 v1(8.75,53.6) ; J2.1 v1(197.5,93.6) ; J1.80 v1(5.25,78.4) ; J2.51 v1(194.75,53.6) ; J1.47 v1(8.75,56.8) ; J2.116 v1(191.25,49.6) ; J1.104 v1(5.25,59.2) ; J2.89 v1(191.25,71.2) ; J1.77 v1(5.25,80.8) ; J2.120 v1(188.55,46.4) ; J2.65 v1(191.25,90.4) ; J2.35 v1(194.75,66.4) ; J2.11 v1(194.75,85.6) ; J1.23 v1(8.75,76)
  BOTTOM w0.515: 99.53,93.69 J3.B18 99.53,95.61 ; 106.17,105.51 J3.A11 106.17,103.59 ; 98.58,98.51 J3.B19 98.58,96.59 ; 110.92,93.69 J3.B6 110.92,95.61 ; 106.17,37.39 J3.H11 106.17,39.31 ; 93.83,100.69 J3.A24 93.83,102.61 ; 93.83,55.49 J3.E24 93.83,57.41 ; 106.17,98.51 J3.B11 106.17,96.59 ; 89.08,60.31 J3.E29 89.08,58.39 ; 101.42,81.61 J3.D16 101.42,79.69 ; 106.17,44.39 J3.G11 106.17,46.31 ; 89.08,91.51 J3.C29 89.08,89.59 ; 89.08,46.31 J3.G29 89.08,44.39 ; 110.92,81.61 J3.D6 110.92,79.69 ; J3.E1 115.68,60.31 ; J3.E1 116.64,59.35 ; J3.E1 115.68,58.39 ; 110.92,86.69 J3.C6 110.92,88.61 ; 98.58,44.39 J3.G19 98.58,46.31 ; 98.58,60.31 J3.E19 98.58,58.39 ; 93.83,81.61 J3.D24 93.83,79.69 ; 98.58,39.31 J3.H19 98.58,37.39 ; 101.42,86.69 J3.C16 101.42,88.61 ; 106.17,91.51 J3.C11 106.17,89.59 ; 101.42,93.69 J3.B16 101.42,95.61 ; 98.58,53.31 J3.F19 98.58,51.39 ; 89.08,98.51 J3.B29 89.08,96.59 ; 98.58,82.59 J3.D19 98.58,84.51 ; 98.58,91.51 J3.C19 98.58,89.59 ; 98.58,103.59 J3.A19 98.58,105.51 ; 106.17,60.31 J3.E11 106.17,58.39 ; 89.08,39.31 J3.H29 89.08,37.39 ; 110.92,55.49 J3.E6 110.92,57.41 ; 93.83,86.69 J3.C24 93.83,88.61 ; 106.17,84.51 J3.D11 106.17,82.59 ; 89.08,51.39 J3.F29 89.08,53.31 ; 101.42,57.41 J3.E16 101.42,55.49 ; 93.83,95.61 J3.B24 93.83,93.69 ; 106.17,53.31 J3.F11 106.17,51.39 ; 89.08,84.51 J3.D29 89.08,82.59
  vias: v1(1,124.5) v1(1,119.5) v1(1,114.5) v1(1,109.5) v1(1,104.5) v1(1,99.5) v1(1,94.5) v1(1,89.5) v1(1,84.5) v1(1,79.5) v1(1,74.5) v1(1,69.5) v1(1,64.5) v1(1,59.5) v1(1,54.5) v1(1,49.5) v1(1,44.5) v1(1,39.5) v1(1,19.5) v1(1,14.5) v1(1,11) v1(1.5,129) v1(4,109.75) v1(4.25,44.88) v1(5,125) v1(5,120) v1(5,115) v1(5,110) v1(5,105) v1(5,100) v1(5,95) v1(5,40) v1(5,35) v1(5,30) v1(5,25) v1(5,20) v1(6,11) v1(6.5,129) v1(9,44.12) v1(10,125) v1(10,120) v1(10,115) v1(10,110) v1(10,105) v1(10,100) v1(10,95) v1(10,40) v1(10,35) v1(10,30) v1(10,25) v1(10,20) v1(10,15) v1(11,11) v1(11.5,129) v1(15,125) v1(15,120) v1(15,115) v1(15,110) v1(15,105) v1(15,100) v1(15,95) v1(15,73.5) v1(15,40) v1(15,35) v1(15,30) v1(15,25) v1(15,20) v1(15,15) v1(15.5,54) v1(15.5,46) v1(16,11) v1(16.5,129) v1(20,125) v1(20,120) v1(20,115) v1(20,110) v1(20,105) v1(20,100) v1(20,95) v1(20,50) v1(20,40) v1(20,35) v1(20,30) v1(20,25) v1(20,20) v1(20,15) v1(20.38,73.5) v1(20.5,57.75) v1(20.75,45.88) v1(21,11) v1(21.5,129) v1(22.75,59.75) v1(24.38,62.5) v1(25,125) v1(25,120) v1(25,115) v1(25,110) v1(25,105) v1(25,100) v1(25,95) v1(25,50) v1(25,40) v1(25,35) v1(25,30) v1(25,25) v1(25,20) v1(25,15) v1(25.12,53.75) v1(25.88,73.5) v1(26,45.88) v1(26,11) v1(26.25,65) v1(26.5,129) v1(28.5,67.25) v1(29.25,59.75) v1(29.38,50) v1(29.38,45.75) v1(29.5,54.88) v1(30,125) v1(30,120) v1(30,115) v1(30,110) v1(30,105) v1(30,100) v1(30,90) v1(30,85) v1(30,80) v1(30,75) v1(30,40) v1(30,35) v1(30,30) v1(30,25) v1(30,20) v1(30,15) v1(30.25,69.62) v1(31,94.75) v1(31,11) v1(31.5,129) v1(32.5,62.75) v1(33.25,45.88) v1(33.62,72.12) v1(33.62,59.38) v1(33.88,54.75) v1(33.88,50) v1(35,125) v1(35,120) v1(35,115) v1(35,110) v1(35,105) v1(35,95) v1(35,90) v1(35,85) v1(35,80) v1(35,75) v1(35,65) v1(35,40) v1(35,35) v1(35,30) v1(35,25) v1(35,20) v1(35,15) v1(35.88,99.75) v1(36,11) v1(36.5,129) v1(37.75,45.88) v1(38,55) v1(38.62,50) v1(39.12,39.75) v1(39.38,69.5) v1(39.5,64.75) v1(40,125) v1(40,120) v1(40,115) v1(40,110) v1(40,100) v1(40,95) v1(40,90) v1(40,85) v1(40,80) v1(40,60) v1(40,35) v1(40,30) v1(40,25) v1(40,20) v1(40,15) v1(40.38,104.25) v1(40.5,72) v1(41.25,11) v1(41.5,129) v1(43,45.75) v1(43.38,49.88) v1(43.75,34.88) v1(43.88,64.38) v1(44.12,39.75) v1(44.25,69.88) v1(44.62,59.88) v1(45,125) v1(45,120) v1(45,115) v1(45,105) v1(45,100) v1(45,95) v1(45,90) v1(45,85) v1(45,75) v1(45,55) v1(45,30) v1(45,25) v1(45,20) v1(45,15) v1(45.25,11) v1(45.62,109.5) v1(46.5,129) v1(47.38,45.88) v1(47.88,78.12) v1(48.62,64.75) v1(48.88,40) v1(49,35) v1(49.38,60) v1(50,125) v1(50,120) v1(50,110) v1(50,105) v1(50,100) v1(50,95) v1(50,90) v1(50,80) v1(50,75) v1(50,70) v1(50,55) v1(50,50) v1(50,30) v1(50,25) v1(50,20) v1(50,15) v1(50.62,114.5) v1(51,11) v1(51.5,129) v1(53.12,83.5) v1(53.62,55.75) v1(53.88,60) v1(54.75,45.88) v1(55,125) v1(55,119.25) v1(55,110) v1(55,105) v1(55,100) v1(55,95) v1(55,85) v1(55,80) v1(55,75) v1(55,70) v1(55,65) v1(55,50) v1(55,40) v1(55,35) v1(55,30) v1(55,25) v1(55,20) v1(55,15) v1(56,11) v1(56.5,129) v1(57.62,87.88) v1(60,125) v1(60,120) v1(60,105) v1(60,100) v1(60,95) v1(60,85) v1(60,80) v1(60,75) v1(60,70) v1(60,65) v1(60,60) v1(60,55.88) v1(60,50) v1(60,40) v1(60,35) v1(60,30) v1(60,25) v1(60,20) v1(60,15) v1(60.38,45.88) v1(61,11) v1(61.5,129) v1(61.88,88.25) v1(65,125) v1(65,120) v1(65,105) v1(65,100) v1(65,95) v1(65,85) v1(65,80) v1(65,75) v1(65,70) v1(65,65) v1(65,60) v1(65,55.75) v1(65,50) v1(65,40) v1(65,35) v1(65,30) v1(65,25) v1(65,20) v1(65,15) v1(66,11) v1(66.12,44.88) v1(66.5,129) v1(66.62,88.25) v1(69.88,55.88) v1(70,125) v1(70,120) v1(70,105) v1(70,100) v1(70,95) v1(70,85) v1(70,80) v1(70,75) v1(70,70) v1(70,65) v1(70,60) v1(70,50) v1(70,45) v1(70,35) v1(70,30) v1(70,25) v1(70,20) v1(70,15) v1(70.75,88.38) v1(71,11) v1(71.5,129) v1(73.38,50) v1(75,125) v1(75,120) v1(75,105) v1(75,95.88) v1(75,85) v1(75,80) v1(75,75) v1(75,70) v1(75,65) v1(75,60) v1(75,45) v1(75,35) v1(75,30) v1(75,25) v1(75,20) v1(75,15) v1(75.12,55.88) v1(76,11) v1(76.38,90.5) v1(76.5,129) v1(76.88,39.62) v1(78.25,92.5) v1(79.38,100.12) v1(79.75,55.88) v1(80,125) v1(80,120) v1(80,105) v1(80,90) v1(80,85) v1(80,80) v1(80,75) v1(80,70) v1(80,65) v1(80,60) v1(80,50) v1(80,45) v1(80,35) v1(80,30) v1(80,25) v1(80,20) v1(80,15) v1(80.75,95.75) v1(81,11) v1(81.5,129) v1(82.12,38.75) v1(83,93.25) v1(85,125) v1(85,120) v1(85,75) v1(85,70) v1(85,65) v1(85,30) v1(85,25) v1(85,20) v1(85,15) v1(85.88,79.38) v1(86,11) v1(86.5,129) v1(90,125) v1(90,120) v1(90,79) v1(90,75) v1(90,65) v1(90,30) v1(90,25) v1(90,20) v1(90,15) v1(91,11) v1(91.5,129) v1(95,125) v1(95,120) v1(95,65) v1(95,30) v1(95,25) v1(95,20) v1(95,15) v1(96,11) v1(96.5,129) v1(100,125) v1(100,120) v1(100,65) v1(100,30) v1(100,25) v1(100,20) v1(100,15) v1(101,11) v1(101.5,129) v1(101.88,32.5) v1(105,125) v1(105,120) v1(105,25) v1(105,20) v1(105,15) v1(105.25,31.12) v1(106,11) v1(106.5,129) v1(109.5,112.12) v1(110,125) v1(110,120) v1(110,65) v1(110,25) v1(110,20) v1(110,15) v1(111,11) v1(111.5,129) v1(113.75,106) v1(115,125) v1(115,120) v1(115,115) v1(115,65) v1(115,30) v1(115,25) v1(115,20) v1(115,15) v1(115.88,108.38) v1(116,11) v1(116.5,129) v1(118.25,37.75) v1(120,125) v1(120,120) v1(120,115) v1(120,110) v1(120,105) v1(120,100) v1(120,95) v1(120,90) v1(120,85) v1(120,30) v1(120,25) v1(120,20) v1(120,15) v1(120.75,42.75) v1(121,11) v1(121.25,49.38) v1(121.5,129) v1(121.62,55.88) v1(121.75,58.88) v1(123.5,34.38) v1(123.62,39.75) v1(123.88,99.88) v1(124,85.25) v1(124.88,105.75) v1(124.88,95.75) v1(125,125) v1(125,120) v1(125,115) v1(125,110) v1(125,90) v1(125,65) v1(125,25) v1(125,20) v1(125,15) v1(126,11) v1(126.25,49.75) v1(126.5,129) v1(126.75,53.5) v1(127.75,91.75) v1(130,125) v1(130,120) v1(130,115) v1(130,110) v1(130,100) v1(130,95.75) v1(130,75) v1(130,70) v1(130,40) v1(130,25) v1(130,20) v1(130,15) v1(130.12,34.25) v1(130.38,105.75) v1(130.88,29.88) v1(131,11) v1(131.25,93.75) v1(131.5,129) v1(132.88,72.25) v1(134.62,49.12) v1(135,125) v1(135,120) v1(135,115) v1(135,110) v1(135,105) v1(135,100) v1(135,93.38) v1(135,45) v1(135,30) v1(135,25) v1(135,20) v1(135,15) v1(135.25,34.62) v1(136,11) v1(136.5,129) v1(140,125) v1(140,120) v1(140,115) v1(140,110) v1(140,105) v1(140,100) v1(140,55) v1(140,35) v1(140,30) v1(140,25) v1(140,20) v1(140,15) v1(140.38,39.62) v1(140.62,68) v1(141,11) v1(141.5,129) v1(145,125) v1(145,120) v1(145,115) v1(145,110) v1(145,105) v1(145,100) v1(145,93.38) v1(145,55) v1(145,40) v1(145,35) v1(145,30) v1(145,25) v1(145,20) v1(145,15) v1(145.25,44.25) v1(146,11) v1(146.5,129) v1(149.5,48.75) v1(150,125) v1(150,120) v1(150,115) v1(150,110) v1(150,105) v1(150,100) v1(150,93.38) v1(150,45) v1(150,40) v1(150,35) v1(150,30) v1(150,25) v1(150,20) v1(150,15) v1(151,11) v1(151.5,129) v1(153.25,55.88) v1(154.5,48.75) v1(155,125) v1(155,120) v1(155,115) v1(155,110) v1(155,105) v1(155,100) v1(155,93.38) v1(155,45) v1(155,40) v1(155,35) v1(155,30) v1(155,25) v1(155,20) v1(155,15) v1(156,11) v1(156.25,56) v1(156.5,129) v1(159.5,53.38) v1(159.5,48.75) v1(160,125) v1(160,120) v1(160,115) v1(160,110) v1(160,105) v1(160,100) v1(160,93.38) v1(160,45) v1(160,40) v1(160,35) v1(160,30) v1(160,25) v1(160,20) v1(160,15) v1(161,11) v1(161.5,129) v1(164.5,48.75) v1(165,125) v1(165,120) v1(165,115) v1(165,110) v1(165,105) v1(165,100) v1(165,93.38) v1(165,53.5) v1(165,45) v1(165,40) v1(165,35) v1(165,30) v1(165,25) v1(165,20) v1(165,15) v1(166,11) v1(166.5,129) v1(169.5,48.75) v1(170,125) v1(170,120) v1(170,115) v1(170,110) v1(170,105) v1(170,100) v1(170,93.38) v1(170,45) v1(170,40) v1(170,35) v1(170,30) v1(170,25) v1(170,20) v1(170,15) v1(171,11) v1(171.12,53.5) v1(171.5,129) v1(174.5,48.75) v1(175,125) v1(175,120) v1(175,115) v1(175,110) v1(175,105) v1(175,100) v1(175,93.38) v1(175,45) v1(175,40) v1(175,35) v1(175,30) v1(175,25) v1(175,20) v1(175,15) v1(175.62,53.62) v1(176,11) v1(176.5,129) v1(179.5,48.75) v1(180,125) v1(180,120) v1(180,115) v1(180,110) v1(180,105) v1(180,100) v1(180,93.38) v1(180,45) v1(180,40) v1(180,35) v1(180,30) v1(180,25) v1(180,20) v1(180,15) v1(180.25,53.5) v1(181,11) v1(181.5,129) v1(184.5,48.75) v1(185,125) v1(185,120) v1(185,115) v1(185,110) v1(185,105) v1(185,100) v1(185,93.38) v1(185,45) v1(185,40) v1(185,35) v1(185,30) v1(185,25) v1(185,20) v1(185,15) v1(185.38,53.5) v1(186,11) v1(186.5,129) v1(189.25,96.75) v1(190,125) v1(190,120) v1(190,115) v1(190,110) v1(190,105) v1(190,100) v1(190,45) v1(190,40) v1(190,35) v1(190,30) v1(190,25) v1(190,20) v1(190,15) v1(191,11) v1(191.25,123.75) v1(191.5,129) v1(193,93.75) v1(195,125) v1(195,120) v1(195,115) v1(195,110) v1(195,105) v1(195,100) v1(195,45) v1(195,40) v1(195,35) v1(195,30) v1(195,25) v1(195,20) v1(195.25,116.75) v1(196,11) v1(196.25,112) v1(196.5,129) v1(198.88,84.62) v1(198.88,69.25) v1(199,127) v1(199,122) v1(199,117) v1(199,112) v1(199,107) v1(199,102) v1(199,97) v1(199,92) v1(199,90.38) v1(199,88.38) v1(199,87) v1(199,82) v1(199,77) v1(199,74.75) v1(199,72) v1(199,67) v1(199,64.5) v1(199,62) v1(199,59.5) v1(199,57) v1(199,52) v1(199,48.25) v1(199,37) v1(199,32) v1(199,27) v1(199,22) v1(199,17) v1(199,12)
Net_96:
  vias: v1(110,105)
Net_108:
  vias: v1(85,105)
PRB_EL_D0: length 255.1
  SIG4 w0.2: v1(11.45,92) 24.25,92 49.25,117 110.12,117 116.75,110.38 116.75,87.5 114.25,85 108,85 107.16,84.16 107.16,82.59 J3.D12 105.22,80.28 106.5,79 115,79 126.5,90.5 189.75,90.5 191.25,92 v1(194.75,92)
  BOTTOM w0.13: J1.3 v1(11.45,92)
  BOTTOM w0.2: J2.3 v1(194.75,92)
PRB_EL_D1: length 251.9
  SIG3 w0.2: v1(194,91.2) 190.95,91.2 190,90.25 128.12,90.25 120.12,82.25 105.58,82.25 J3.D13 105.86,85.14 114.76,85.14 116.75,87.12 116.75,110.25 111.61,115.39 50.14,115.39 25.95,91.2 v1(12.25,91.2)
  BOTTOM w0.13: J1.4 v1(12.25,91.2)
  BOTTOM w0.2: J2.4 v1(194,91.2)
PRB_EL_D2: length 256.3
  SIG4 w0.2: v1(194.75,89.6) 191.1,89.6 189.5,88 126,88 115.5,77.5 106.13,77.5 103.33,80.3 J3.D14 105.21,82.54 105.21,84.71 107,86.5 113,86.5 113.75,87.25 113.75,89 114.75,90 114.75,92.62 113.75,93.62 113.75,95.75 114.75,96.75 114.75,99.75 115.88,100.88 115.88,102.25 114.75,103.38 114.75,110 109.25,115.5 50.62,115.5 24.73,89.6 v1(11.45,89.6)
  BOTTOM w0.13: J1.6 v1(11.45,89.6)
  BOTTOM w0.2: J2.6 v1(194.75,89.6)
PRB_EL_D3: length 256
  SIG3 w0.2: v1(194,88.8) 190.8,88.8 189.75,87.75 128.75,87.75 120.25,79.25 103,79.25 102.37,79.88 J3.D15 105.22,86.4 113.15,86.4 113.75,87 113.75,88.88 114.75,89.88 114.75,92.5 113.75,93.5 113.75,95.75 114.75,96.75 114.75,99.75 115.88,100.88 115.88,102.25 114.75,103.38 114.75,109.88 111,113.62 52.12,113.62 27.3,88.8 v1(12.25,88.8)
  BOTTOM w0.13: J1.7 v1(12.25,88.8)
  BOTTOM w0.2: J2.7 v1(194,88.8)
PRB_EL_D4: length 247.5
  SIG4 w0.2: v1(194.75,87.2) 191.2,87.2 189.75,85.75 125.5,85.75 115.75,76 105.5,76 102.38,79.12 102.38,81.75 103.38,82.75 103.38,85.25 105.22,87.1 J3.C12 106.72,89.15 108.52,89.15 109.04,89.66 109.04,91.16 111.87,94 111.87,95.37 112.88,96.38 112.88,99.38 111.88,100.38 111.88,102.62 110.88,103.62 110.88,105.25 102.12,114 52.25,114 25.45,87.2 v1(11.45,87.2)
  BOTTOM w0.13: J1.9 v1(11.45,87.2)
  BOTTOM w0.2: J2.9 v1(194.75,87.2)
PRB_EL_D5: length 246.7
  SIG3 w0.2: v1(12.25,86.4) 28.52,86.4 53.62,111.5 104.62,111.5 110.88,105.25 110.88,103.62 110,102.75 110,100 110.88,99.12 110.88,96.5 110,95.62 110,93.5 108.57,92.07 105.8,92.07 J3.C13 102.38,88.65 102.38,85.75 101.38,84.75 101.38,83 100.5,82.12 100.5,78.5 101.25,77.75 121.88,77.75 129.62,85.5 190,85.5 190.9,86.4 v1(194,86.4)
  BOTTOM w0.13: J1.10 v1(12.25,86.4)
  BOTTOM w0.2: J2.10 v1(194,86.4)
PRB_EL_D6: length 247.9
  SIG4 w0.2: v1(194.75,84.8) 191.05,84.8 189.5,83.25 125,83.25 116.25,74.5 105,74.5 100.5,79 100.5,81.5 101.38,82.38 101.38,85.38 103.33,87.33 J3.C14 105.25,89.57 105.25,91.75 105.91,92.41 108.41,92.41 109.94,93.94 109.94,95.56 110.88,96.5 110.88,99.12 110,100 110,102.62 109.06,103.56 109.06,105.19 101.75,112.5 53.37,112.5 25.67,84.8 v1(11.45,84.8)
  BOTTOM w0.13: J1.12 v1(11.45,84.8)
  BOTTOM w0.2: J2.12 v1(194.75,84.8)
PRB_EL_D7: length 247.1
  SIG3 w0.2: v1(12.25,84) 30.25,84 56.52,110.27 104.48,110.27 109,105.75 109,103.5 108.12,102.62 108.12,100.12 109,99.25 109,96.25 108.12,95.38 108.12,94.12 107.53,93.53 105.35,93.53 J3.C15 101.2,89.38 101.2,89.32 100.5,88.62 100.5,85.62 99.5,84.62 99.5,82.62 98.75,81.88 98.62,81.88 98.62,78.12 100.5,76.25 123.31,76.25 130.06,83 189.75,83 190.75,84 v1(194,84)
  BOTTOM w0.13: J1.13 v1(12.25,84)
  BOTTOM w0.2: J2.13 v1(194,84)
PRB_EL_D8: length 250.2
  SIG4 w0.2: v1(194.75,82.4) 190.9,82.4 189.5,81 125,81 117,73 104.5,73 98.62,78.88 98.62,81.75 99.5,82.62 99.5,84.62 98.62,85.5 98.62,88.88 99.5,89.75 99.5,91.44 100.12,92.06 103.69,92.06 105.22,93.6 J3.B12 106.2,95.62 107.75,95.62 109,96.88 109,99.25 108.12,100.13 108.12,102.63 107.12,103.62 107.12,105.25 101.38,111 54.5,111 25.9,82.4 v1(11.45,82.4)
  BOTTOM w0.13: J1.15 v1(11.45,82.4)
  BOTTOM w0.2: J2.15 v1(194.75,82.4)
PRB_EL_D9: length 248.1
  SIG3 w0.2: v1(12.25,81.6) 32.73,81.6 60.16,109.04 103.71,109.04 107.12,105.62 107.12,103.38 106.12,102.38 106.12,99.4 J3.B13 104.28,97.53 102.38,95.62 102.38,93.75 102,93.38 98.75,93.38 97.62,92.25 97.62,89.62 96.75,88.75 96.75,86 97.62,85.12 97.62,82.62 96.62,81.62 96.62,77.88 99.75,74.75 124.5,74.75 130.5,80.75 189.75,80.75 190.6,81.6 v1(194,81.6)
  BOTTOM w0.13: J1.16 v1(12.25,81.6)
  BOTTOM w0.2: J2.16 v1(194,81.6)
PRB_EL_D10: length 250.4
  SIG4 w0.2: v1(11.45,80) 26.12,80 55.62,109.5 100.88,109.5 105.25,105.13 105.25,104 106.19,103.06 106.19,100.41 107.1,99.5 107.1,96.85 106.75,96.5 105.18,96.5 J3.B14 103.33,94.08 102.5,93.25 98.62,93.25 97.62,92.25 97.62,89.5 96.75,88.62 96.75,85.88 97.62,85 97.62,82.62 96.75,81.75 96.75,78.75 104,71.5 117.75,71.5 124.75,78.5 189.75,78.5 191.25,80 v1(194.75,80)
  BOTTOM w0.13: J1.18 v1(11.45,80)
  BOTTOM w0.2: J2.18 v1(194.75,80)
PRB_EL_D11: length 248.9
  SIG3 w0.2: v1(194,79.2) 190.95,79.2 190,78.25 131,78.25 126,73.25 99,73.25 94.75,77.5 94.75,81.62 95.75,82.62 95.75,84.75 94.75,85.75 94.75,88.62 95.75,89.62 95.75,92.75 96.75,93.75 96.75,95.5 97.62,96.38 101.38,96.38 102.37,97.37 J3.B15 104.29,99.46 104.29,102.54 105.25,103.5 105.25,105.5 102.95,107.8 64.05,107.8 35.45,79.2 v1(12.25,79.2)
  BOTTOM w0.13: J1.19 v1(12.25,79.2)
  BOTTOM w0.2: J2.19 v1(194,79.2)
PRB_EL_D12: length 253.2
  SIG4 w0.2: v1(194.75,77.6) 190.85,77.6 189.5,76.25 124.75,76.25 118.5,70 103.5,70 94.75,78.75 94.75,81.62 95.75,82.62 95.75,84.75 94.75,85.75 94.75,88.62 95.75,89.62 95.75,91.88 94.75,92.88 94.75,95.62 95.75,96.62 95.75,98.5 96.12,98.88 104.38,98.88 105.22,99.72 J3.A12 105.25,101.67 105.25,102 103.37,103.88 103.37,105.13 100.5,108 56.75,108 26.35,77.6 v1(11.45,77.6)
  BOTTOM w0.13: J1.21 v1(11.45,77.6)
  BOTTOM w0.2: J2.21 v1(194.75,77.6)
PRB_EL_D13: length 257.1
  SIG3 w0.2: v1(12.25,76.8) 35.67,76.8 65.44,106.56 102.26,106.56 J3.A13 104.28,104.03 102.38,102.12 102.38,100.5 101.62,99.75 94.25,99.75 93.88,99.38 93.88,96.5 92.88,95.5 92.88,92.75 93.88,91.75 93.88,89.62 92.88,88.62 92.88,85.75 93.88,84.75 93.88,82.75 92.88,81.75 92.88,77.25 103.38,66.75 129.75,66.75 139,76 190,76 190.8,76.8 v1(194,76.8)
  BOTTOM w0.13: J1.22 v1(12.25,76.8)
  BOTTOM w0.2: J2.22 v1(194,76.8)
PRB_EL_D14: length 252.8
  SIG4 w0.2: v1(11.45,75.2) 26.57,75.2 57.88,106.5 100.12,106.5 101.5,105.13 101.5,104 103.33,102.17 J3.A14 103.33,101.33 102.38,100.38 94.88,100.38 93.88,99.38 93.88,96.5 92.88,95.5 92.88,92.75 93.88,91.75 93.88,89.62 92.88,88.62 92.88,85.75 93.88,84.75 93.88,82.75 92.88,81.75 92.88,78.62 103,68.5 119.25,68.5 124.5,73.75 189.75,73.75 191.2,75.2 v1(194.75,75.2)
  BOTTOM w0.13: J1.24 v1(11.45,75.2)
  BOTTOM w0.2: J2.24 v1(194.75,75.2)
PRB_EL_D15: length 258.7
  SIG3 w0.2: v1(194,74.4) 191.15,74.4 190.25,73.5 139.5,73.5 130.25,64.25 103.5,64.25 91,76.75 91,81.62 92,82.62 92,84.75 91,85.75 91,88.62 91.88,89.5 91.88,92.25 91,93.12 91,95.62 92,96.62 92,99.5 92.88,100.38 92.88,102.25 93.88,103.25 101.75,103.25 102.38,103.88 102.38,104.55 J3.A15 101.42,105.5 69.25,105.5 38.15,74.4 v1(12.25,74.4)
  BOTTOM w0.13: J1.25 v1(12.25,74.4)
  BOTTOM w0.2: J2.25 v1(194,74.4)
PRB_EL_D16: length 199.5
  SIG3 w0.2: v1(11.45,72.8) 38.24,72.8 53.04,58 103.68,58 J3.E12 106.77,58 126.62,58 139.88,71.25 189.5,71.25 191.05,72.8 v1(194.75,72.8)
  BOTTOM w0.13: J1.27 v1(11.45,72.8)
  BOTTOM w0.2: J2.27 v1(194.75,72.8)
PRB_EL_D17: length 196.7
  SIG4 w0.2: v1(194,72) 190.75,72 189.75,71 136,71 125.25,60.25 105.18,60.25 J3.E13 104.28,59.72 103.25,60.75 41.25,60.75 30,72 v1(12.25,72)
  BOTTOM w0.13: J1.28 v1(12.25,72)
  BOTTOM w0.2: J2.28 v1(194,72)
PRB_EL_D18: length 200.4
  SIG3 w0.2: v1(11.45,70.4) 36.05,70.4 51.7,54.75 101.62,54.75 J3.E14 105.03,54.75 126.38,54.75 140.62,69 189.75,69 191.15,70.4 v1(194.75,70.4)
  BOTTOM w0.13: J1.30 v1(11.45,70.4)
  BOTTOM w0.2: J2.30 v1(194.75,70.4)
PRB_EL_D19: length 197.1
  SIG4 w0.2: v1(12.25,69.6) 28.4,69.6 40.25,57.75 101,57.75 102.37,59.12 J3.E15 103.72,58 126,58 136.75,68.75 190,68.75 190.85,69.6 v1(194,69.6)
  BOTTOM w0.13: J1.31 v1(12.25,69.6)
  BOTTOM w0.2: J2.31 v1(194,69.6)
PRB_EL_D20: length 201.4
  SIG3 w0.2: v1(11.45,68) 33.15,68 50.15,51 103.67,51 J3.F12 106.78,51 125.75,51 141.25,66.5 189.75,66.5 191.25,68 v1(194.75,68)
  BOTTOM w0.13: J1.33 v1(11.45,68)
  BOTTOM w0.2: J2.33 v1(194.75,68)
PRB_EL_D21: length 198.5
  SIG4 w0.2: v1(12.25,67.2) 26.8,67.2 39.75,54.25 102.75,54.25 104.28,52.72 J3.F13 106.18,54.25 126,54.25 138,66.25 190,66.25 190.95,67.2 v1(194,67.2)
  BOTTOM w0.13: J1.34 v1(12.25,67.2)
  BOTTOM w0.2: J2.34 v1(194,67.2)
PRB_EL_D22: length 202.1
  SIG3 w0.2: v1(194.75,65.6) 191.1,65.6 189.5,64 141.5,64 125.38,47.88 104.9,47.88 J3.F14 101.63,47.75 48.8,47.75 30.95,65.6 v1(11.45,65.6)
  BOTTOM w0.13: J1.36 v1(11.45,65.6)
  BOTTOM w0.2: J2.36 v1(194.75,65.6)
PRB_EL_D23: length 198.7
  SIG4 w0.2: v1(12.25,64.8) 25.2,64.8 39,51 101.25,51 102.37,52.12 J3.F15 103.72,51 125.75,51 138.5,63.75 189.75,63.75 190.8,64.8 v1(194,64.8)
  BOTTOM w0.13: J1.37 v1(12.25,64.8)
  BOTTOM w0.2: J2.37 v1(194,64.8)
PRB_EL_D24: length 203.2
  SIG3 w0.2: v1(194.75,63.2) 190.95,63.2 189.5,61.75 141.88,61.75 124.12,44 106.78,44 J3.G12 103.8,43.88 47.02,43.88 27.69,63.2 v1(11.45,63.2)
  BOTTOM w0.13: J1.39 v1(11.45,63.2)
  BOTTOM w0.2: J2.39 v1(194.75,63.2)
PRB_EL_D25: length 200.1
  SIG4 w0.2: v1(12.25,62.4) 23.1,62.4 38.5,47 102.63,47 J3.G13 105.92,47 124.75,47 139.25,61.5 189.75,61.5 190.65,62.4 v1(194,62.4)
  BOTTOM w0.13: J1.40 v1(12.25,62.4)
  BOTTOM w0.2: J2.40 v1(194,62.4)
PRB_EL_D26: length 207.8
  SIG3 w0.2: v1(11.45,60.8) 26.25,60.8 27.63,59.42 27.63,59.38 50.88,36.12 75.12,36.12 79.88,40.88 101.75,40.88 J3.G14 104.9,40.88 123.75,40.88 142.12,59.25 189.25,59.25 190.8,60.8 v1(194.75,60.8)
  BOTTOM w0.13: J1.42 v1(11.45,60.8)
  BOTTOM w0.2: J2.42 v1(194.75,60.8)
PRB_EL_D27: length 200.8
  SIG4 w0.2: v1(194,60) 190.5,60 189.5,59 140,59 124.75,43.75 103.97,43.75 J3.G15 102.35,45.35 100.75,43.75 37.25,43.75 21,60 v1(12,60)
  BOTTOM w0.13: J1.43 v1(12,60)
  BOTTOM w0.2: J2.43 v1(194,60)
PRB_EL_D28: length 208.7
  SIG3 w0.2: v1(11.45,58.4) 22.95,58.4 48.1,33.25 76.12,33.25 79.88,37 103.67,37 J3.H12 106.78,37 119.25,37 120,36.25 132.5,36.25 153.25,57 189.75,57 191.15,58.4 v1(194.75,58.4)
  BOTTOM w0.13: J1.45 v1(11.45,58.4)
  BOTTOM w0.2: J2.45 v1(194.75,58.4)
PRB_EL_D29: length 208.6
  SIG4 w0.2: v1(194,57.6) 190.85,57.6 190,56.75 152,56.75 131,35.75 122,35.75 118,39.75 105.67,39.75 J3.H13 104.28,38.47 103,39.75 79.25,39.75 75.25,35.75 41.25,35.75 19.4,57.6 v1(12,57.6)
  BOTTOM w0.13: J1.46 v1(12,57.6)
  BOTTOM w0.2: J2.46 v1(194,57.6)
PRB_EL_D30: length 216.4
  SIG3 w0.2: v1(194.75,56) 191,56 189.5,54.5 154.25,54.5 126.25,26.5 107.88,26.5 103.88,30.5 103.88,34.9 J3.H14 99.25,31.38 45.38,31.38 20.75,56 v1(11.45,56)
  BOTTOM w0.13: J1.48 v1(11.45,56)
  BOTTOM w0.2: J2.48 v1(194.75,56)
PRB_EL_D31: length 208.4
  SIG4 w0.2: v1(12,55.2) 18.3,55.2 40,33.5 76,33.5 79.5,37 101.02,37 J3.H15 103.72,37 117.25,37 121.25,33 131.75,33 153,54.25 189.75,54.25 190.7,55.2 v1(194,55.2)
  BOTTOM w0.13: J1.49 v1(12,55.2)
  BOTTOM w0.2: J2.49 v1(194,55.2)
PRB_EL_D32: length 256.9
  SIG1 w0.2: v1(188.55,92) 129,92 116,79 98.5,79 97.63,79.87 J3.D20 98.98,82 108.25,82 109,82.75 109,85.12 108.12,86 108.12,88.75 109,89.62 109,92 108.12,92.88 108.12,95.75 109,96.62 109,99.38 108.12,100.25 108.12,102.88 109,103.75 109,105.88 108.19,106.69 108.19,108.94 101.12,116 54.88,116 31.88,93 11,93 10,92 v1(5.25,92)
  BOTTOM w0.13: J1.63 v1(5.25,92)
  BOTTOM w0.2: J2.63 v1(188.55,92)
PRB_EL_D33: length 258
  SIG2 w0.2: v1(188,91.2) 125.45,91.2 116.25,82 97.5,82 96.67,82.83 J3.D21 96.67,84.42 97.12,84.88 104.75,84.88 106.12,86.25 106.12,88.75 107.12,89.75 107.12,92.62 106.12,93.62 106.12,95.62 107.12,96.62 107.12,99.62 108.12,100.62 108.12,102.75 109,103.62 109,106.5 108.12,107.38 108.12,113.38 101,120.5 51.75,120.5 24,92.75 10.25,92.75 8.7,91.2 v1(6,91.2)
  BOTTOM w0.13: J1.64 v1(6,91.2)
  BOTTOM w0.2: J2.64 v1(188,91.2)
PRB_EL_D34: length 253.4
  SIG1 w0.2: v1(5.25,89.6) 9.85,89.6 10.75,90.5 33,90.5 57.25,114.75 100.12,114.75 107.12,107.75 107.12,103.5 106.25,102.62 106.25,100 107.12,99.12 107.12,96.75 106.25,95.88 106.25,93.62 105,92.38 105,92.37 104.12,92.37 103.31,91.56 103.31,89.81 102.56,89.06 100.94,89.06 100.5,88.62 100.5,86.88 98.25,84.62 96.25,84.62 95.72,84.1 J3.D22 95.72,79.28 98,77 116.5,77 129.1,89.6 v1(188.55,89.6)
  BOTTOM w0.13: J1.66 v1(5.25,89.6)
  BOTTOM w0.2: J2.66 v1(188.55,89.6)
PRB_EL_D35: length 259.5
  SIG2 w0.2: v1(6,88.8) 8.55,88.8 10.25,90.5 25.5,90.5 53.5,118.5 99.5,118.5 107.12,110.88 107.12,103.62 106.12,102.62 106.12,99.88 105.25,99 105.25,96.88 104.38,96 104.38,93.38 105.25,92.5 105.25,89.75 104.25,88.75 104.25,86.87 103.75,86.37 96.37,86.37 94.78,84.78 J3.D23 94.78,79.73 95.5,79 116,79 125.8,88.8 v1(188,88.8)
  BOTTOM w0.13: J1.67 v1(6,88.8)
  BOTTOM w0.2: J2.67 v1(188,88.8)
PRB_EL_D36: length 253.7
  SIG1 w0.2: v1(188.55,87.2) 129.7,87.2 117.5,75 97.5,75 92.88,79.62 92.88,81.5 93.88,82.5 93.88,84.62 94.26,85.01 94.99,85.01 J3.C20 97.63,91.25 98,91.62 100.87,91.62 102.38,93.12 102.38,95.62 103.38,96.62 103.38,98.62 104.31,99.56 104.31,102.69 105.25,103.62 105.25,107.25 99,113.5 59.75,113.5 34.25,88 11,88 10.2,87.2 v1(5.25,87.2)
  BOTTOM w0.13: J1.69 v1(5.25,87.2)
  BOTTOM w0.2: J2.69 v1(188.55,87.2)
PRB_EL_D37: length 254.3
  SIG2 w0.2: v1(188,86.4) 126.4,86.4 117.5,77.5 94.5,77.5 92.88,79.12 92.88,81.88 93.75,82.75 93.75,85.5 94.75,86.5 94.75,88 96.67,89.92 J3.C21 97.87,91.75 98.88,91.75 100.5,93.37 100.5,95.5 101.38,96.38 101.38,98 104.25,100.88 104.25,102.62 105.25,103.62 105.25,109.75 98.5,116.5 54.5,116.5 26,88 10.5,88 8.9,86.4 v1(6,86.4)
  BOTTOM w0.13: J1.70 v1(6,86.4)
  BOTTOM w0.2: J2.70 v1(188,86.4)
PRB_EL_D38: length 254.4
  SIG1 w0.2: v1(5.25,84.8) 9.8,84.8 10.75,85.75 34.75,85.75 61.25,112.25 97.88,112.25 103.38,106.75 103.38,103.75 102.37,102.75 102.37,99.5 101.38,98.5 101.38,96.5 100.5,95.62 100.5,93.75 99.62,92.88 97.25,92.88 95.72,91.35 J3.C22 94.29,86.21 93.09,86.21 91.97,85.1 91.97,82.47 91,81.5 91,79 97,73 118.5,73 130.3,84.8 v1(188.55,84.8)
  BOTTOM w0.13: J1.72 v1(5.25,84.8)
  BOTTOM w0.2: J2.72 v1(188.55,84.8)
PRB_EL_D39: length 253.7
  SIG2 w0.2: v1(188,84) 126.5,84 118.5,76 93,76 91,78 91,81.5 92,82.5 92,85.12 92.92,86.05 92.92,88.7 J3.C23 94.78,91.02 96.88,93.12 97.75,93.12 98.62,94 98.62,95.75 99.5,96.62 99.5,98.25 102.38,101.12 102.38,102.62 103.25,103.5 103.25,108.75 97.5,114.5 57,114.5 28,85.5 10,85.5 8.5,84 v1(6,84)
  BOTTOM w0.13: J1.73 v1(6,84)
  BOTTOM w0.2: J2.73 v1(188,84)
PRB_EL_D40: length 254.8
  SIG1 w0.2: v1(5.25,82.4) 9.65,82.4 10.25,83 35.5,83 63,110.5 97.38,110.5 101.5,106.38 101.5,103.62 100.56,102.69 100.56,99.69 99.55,98.68 99.55,96.57 J3.B20 94.98,92 92.5,92 91.88,91.38 91.88,89.5 91,88.62 91,86.12 90,85.12 90,82.75 89,81.75 89,77.5 95.5,71 120,71 131.4,82.4 v1(188.55,82.4)
  BOTTOM w0.13: J1.75 v1(5.25,82.4)
  BOTTOM w0.2: J2.75 v1(188.55,82.4)
PRB_EL_D41: length 253.6
  SIG2 w0.2: v1(188,81.6) 126.6,81.6 119.5,74.5 92,74.5 89.12,77.38 89.12,82 90,82.88 90,85.75 91,86.75 91,88.62 91.88,89.5 91.88,91.75 92.62,92.5 93.88,92.5 94.75,93.38 94.75,95.63 J3.B21 97.05,97.55 100.5,101 100.5,102.38 101.5,103.38 101.5,107.5 96.5,112.5 59.75,112.5 30.5,83.25 10.5,83.25 8.85,81.6 v1(6,81.6)
  BOTTOM w0.13: J1.76 v1(6,81.6)
  BOTTOM w0.2: J2.76 v1(188,81.6)
PRB_EL_D42: length 264.3
  SIG1 w0.2: v1(5.25,80) 9.75,80 10.75,81 37,81 65.25,109.25 96.5,109.25 99.5,106.25 99.5,103.5 98.62,102.62 98.62,99.62 97.62,98.62 97.62,96.75 95.72,94.85 J3.B22 94.08,93 84,93 81.5,90.5 81.5,82.25 94.25,69.5 121.5,69.5 132,80 v1(188.55,80)
  BOTTOM w0.13: J1.78 v1(5,80) v1(5.25,80)
  BOTTOM w0.2: J2.78 v1(188.55,80)
PRB_EL_D43: length 263.4
  SIG2 w0.2: v1(6,79.2) 8.95,79.2 10.5,80.75 33,80.75 62.75,110.5 95.5,110.5 99.5,106.5 99.5,103.38 98.62,102.5 98.62,100.75 97.25,99.38 96.38,99.38 94.78,97.78 J3.B23 93.22,96 84,96 81.5,93.5 81.5,81 89.5,73 120.5,73 126.7,79.2 v1(188,79.2)
  BOTTOM w0.13: J1.79 v1(6,79.2)
  BOTTOM w0.2: J2.79 v1(188,79.2)
PRB_EL_D44: length 267.5
  SIG1 w0.2: v1(188.55,77.6) 142.1,77.6 130,65.5 95.5,65.5 79,82 79,93 85,99 95.75,99 97.63,100.88 J3.A20 97.63,105.62 95.5,107.75 68.62,107.75 39.62,78.75 11,78.75 9.85,77.6 v1(5.25,77.6)
  BOTTOM w0.13: J1.81 v1(5.25,77.6)
  BOTTOM w0.2: J2.81 v1(188.55,77.6)
